# EAGLE board teensyShield1.8 (EAGLE 7.7.0)
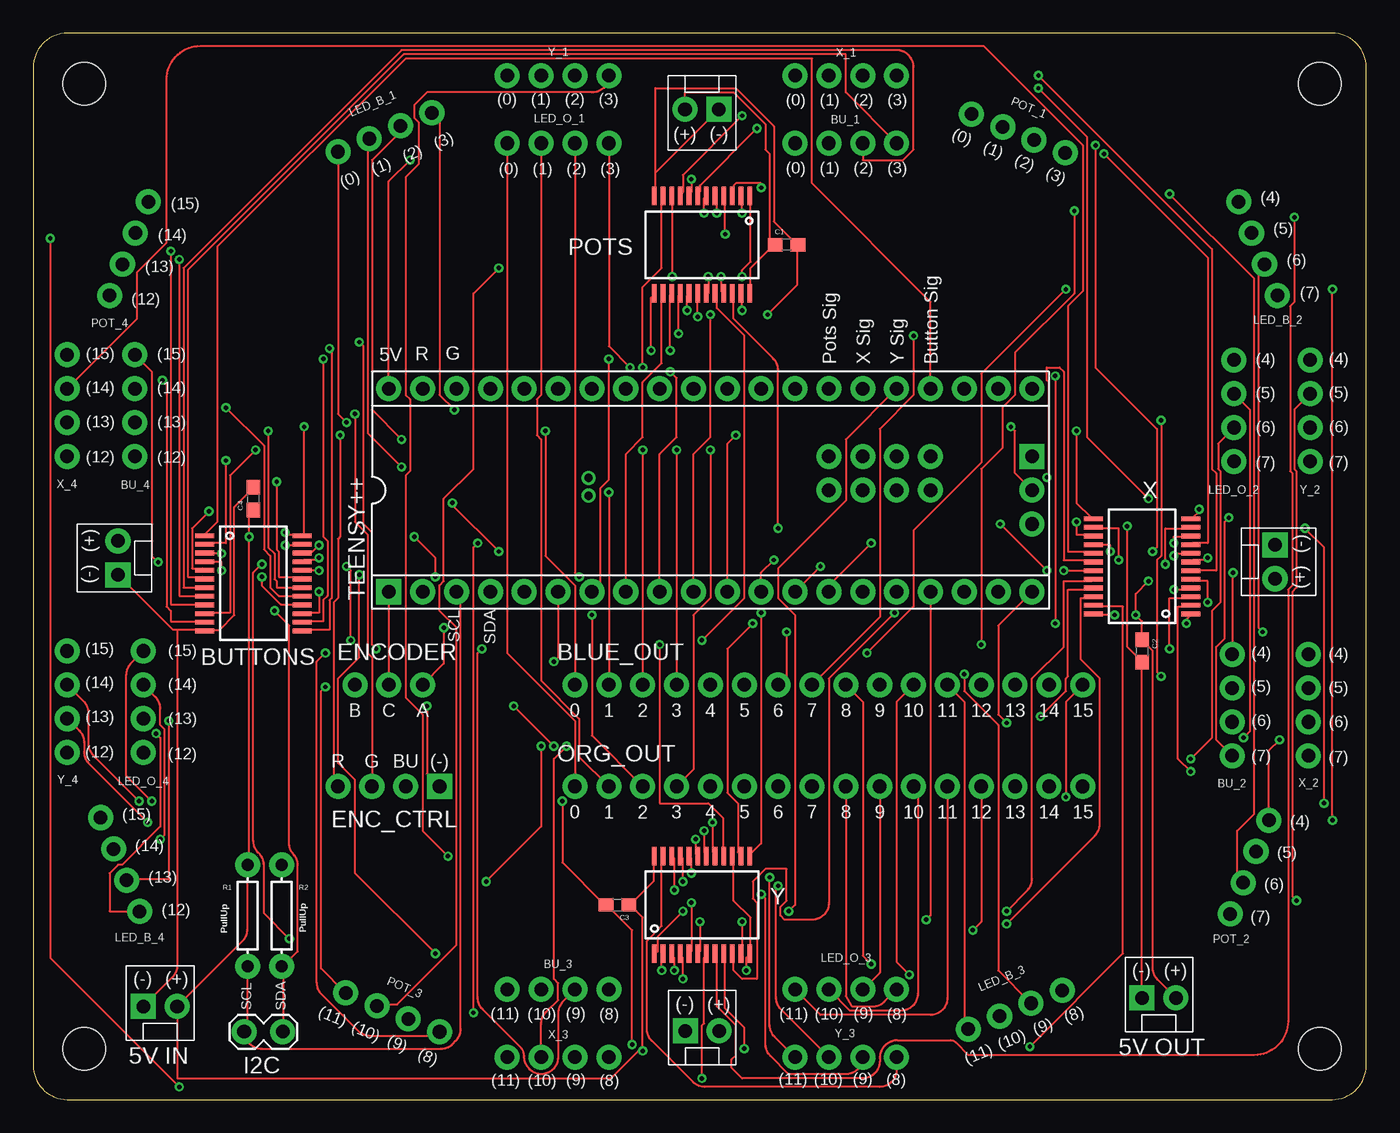
[diagram p0: board, top side]
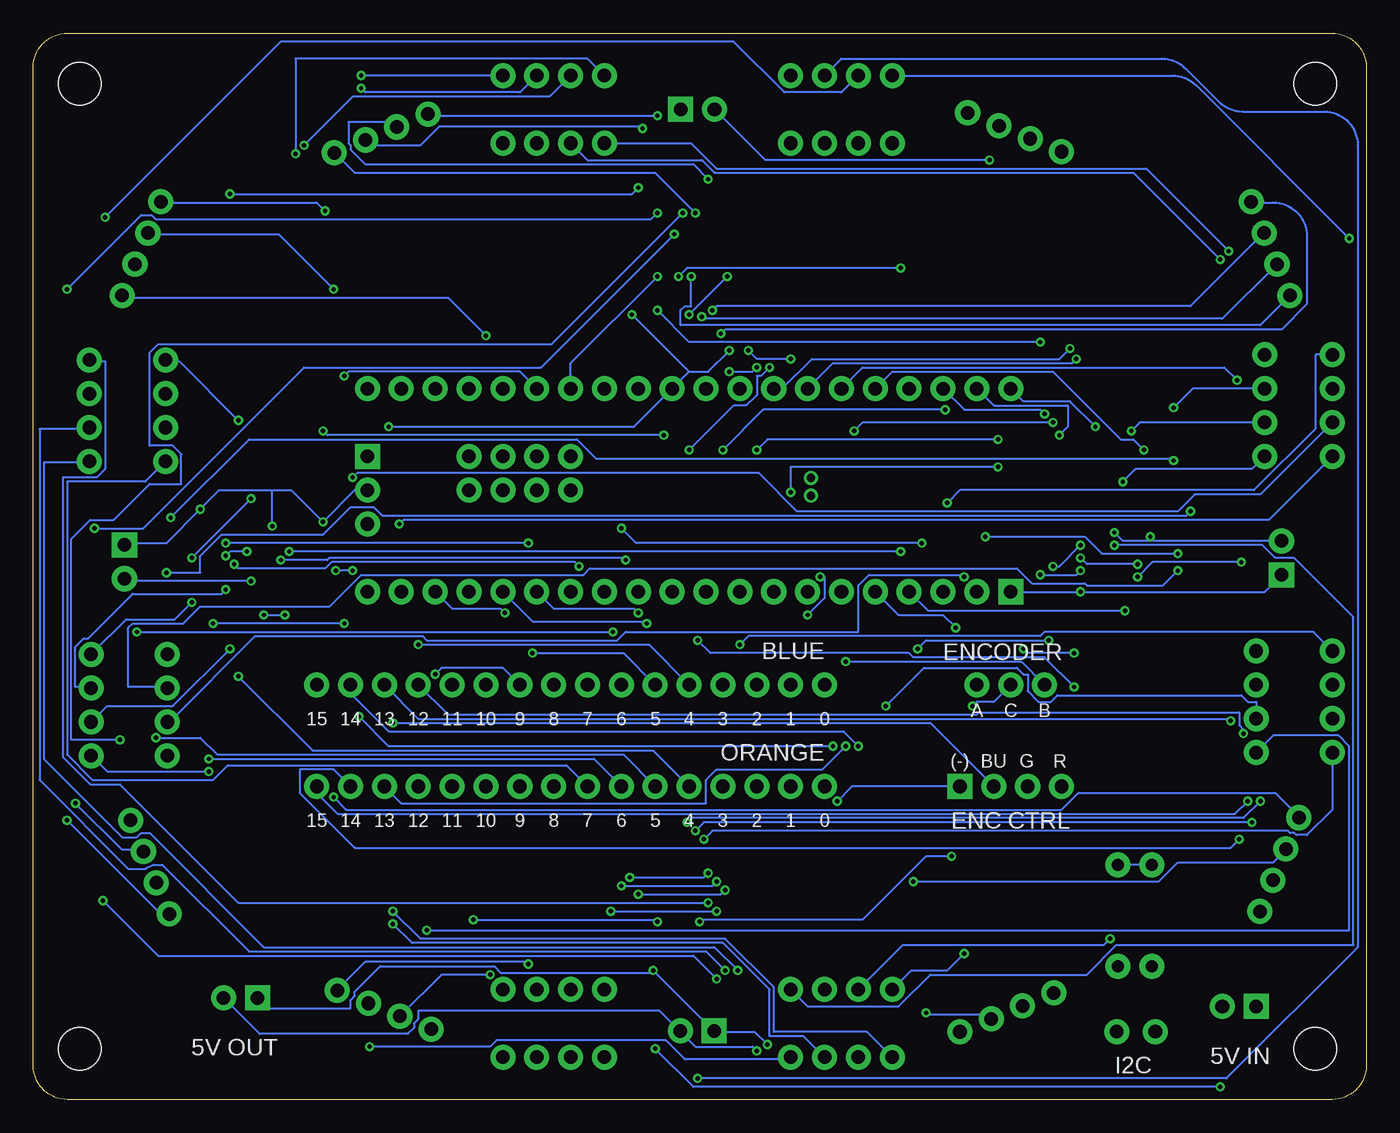
[diagram p1: board, bottom side, seen from below]

Size 100 x 80 mm. Coordinates in mm from the lower left corner, seen from the top.
Outline: 2.54,0 97.46,0 arc90 100,2.54 100,77.46 arc90 97.46,80 2.54,80 arc90 0,77.46 0,2.54 arc90 2.54,0
Copper layers (1*16): Top 0.0356mm / dielectric 1.5011mm / Bottom 0.0356mm
Design rules "oshpark-2layer": minimum track width 6mil, minimum drill 13mil, track to track 6mil, track to pad 6mil, pad to pad 6mil, via to via 6mil, smd to smd 6mil, copper to edge 15mil, drill to drill 6mil, minimum pad ring 7mil, minimum via ring 7mil, stop-mask expansion 2.5mil, vias tented up to drill 0mil, thermal gap 10mil
Holes 3.2 mm at 96.52,3.81 96.52,76.2 3.81,76.2 3.81,3.81

## Footprints (pad centres in the part's own frame; a part is rotated, then mirrored left to right if it is on the bottom)
1X16_NO_SILK = drill 1.016 pad 1.88: 1 0,0; 2 2.54,0; 3 5.08,0; 4 7.62,0; 5 10.16,0; 6 12.7,0; 7 15.24,0; 8 17.78,0; 9 20.32,0; 10 22.86,0; 11 25.4,0; 12 27.94,0; 13 30.48,0; 14 33.02,0; 15 35.56,0; 16 38.1,0
1X04_NO_SILK_ALL_ROUND = drill 1.016 pad 1.88: 1 0,0; 2 2.54,0; 3 5.08,0; 4 7.62,0
SSOP24 = smd 0.348 x 1.397: 1 -3.575,-3.656; 2 -2.925,-3.656; 3 -2.275,-3.656; 4 -1.625,-3.656; 5 -0.975,-3.656; 6 -0.325,-3.656; 7 0.325,-3.656; 8 0.975,-3.656; 9 1.625,-3.656; 10 2.275,-3.656; 11 2.925,-3.656; 12 3.575,-3.656; 13 3.575,3.656; 14 2.925,3.656; 15 2.275,3.656; 16 1.625,3.656; 17 0.975,3.656; 18 0.325,3.656; 19 -0.325,3.656; 20 -0.975,3.656; 21 -1.625,3.656; 22 -2.275,3.656; 23 -2.925,3.656; 24 -3.575,3.656
0603 = smd 1.1 x 1: 1 -0.85,0; 2 0.85,0
1X04_NO_SILK = drill 1.016 pad 1.88 square: 1 0,0 | drill 1.016 pad 1.88: 2 2.54,0; 3 5.08,0; 4 7.62,0
1X03_NO_SILK = drill 1.016 pad 1.88: 1 0,0; 2 2.54,0; 3 5.08,0
1X02_LOCK = drill 1.016 pad 1.88: 1 -0.178,0; 2 2.718,0
MOLEX-1X2 = drill 1.016 pad 1.88 square: 1 0,0 | drill 1.016 pad 1.88: 2 2.54,0
AXIAL-0.3 = drill 0.9 pad 1.88: P$1 -3.81,0; P$2 3.81,0
TEENSY++ = drill 1.016 pad 1.88: 5V 24.13,-2.54; +5V -24.13,7.62; A0 8.89,0; A1 11.43,0; A2 13.97,0; A3 16.51,0; A4 8.89,2.54; A5 11.43,2.54; A6 13.97,2.54; A7 16.51,2.54; B0 -6.35,7.62; B1 -8.89,7.62; B2 -11.43,7.62; B3 -13.97,7.62; B4 -16.51,7.62; B5 -19.05,7.62; B6 -21.59,7.62; B7 -21.59,-7.62; C0 6.35,-7.62; C1 8.89,-7.62; C2 11.43,-7.62; C3 13.97,-7.62; C4 16.51,-7.62; C5 19.05,-7.62; C6 21.59,-7.62; C7 24.13,-7.62; D0 -19.05,-7.62; D1 -16.51,-7.62; D2 -13.97,-7.62; D3 -11.43,-7.62; D4 -8.89,-7.62; D5 -6.35,-7.62; D6 -3.81,-7.62; D7 -1.27,-7.62; E0 1.27,-7.62; E1 3.81,-7.62; E6 -1.27,7.62; E7 -3.81,7.62; F0 6.35,7.62; F1 8.89,7.62; F2 11.43,7.62; F3 13.97,7.62; F4 16.51,7.62; F5 19.05,7.62; F6 21.59,7.62; F7 24.13,7.62; GND2 24.13,0; GRND1 1.27,7.62; REF 3.81,7.62 | drill 0.635 pad 1.067: E4 -9.144,0.914; E5 -9.144,-0.406 | drill 1.016 pad 1.88 square: GND -24.13,-7.62; RST 24.13,2.54

## Placement (x,y rotation side)
BLUE_OUT  [1X16_NO_SILK]  40.64,31.11 0 top
BU_1  [1X04_NO_SILK_ALL_ROUND]  57.15,71.75 0 top
BU_2  [1X04_NO_SILK_ALL_ROUND]  89.95,33.41 270 top
BU_3  [1X04_NO_SILK_ALL_ROUND]  43.18,8.26 180 top
BU_4  [1X04_NO_SILK_ALL_ROUND]  7.62,48.26 90 top
BUTTONS  MUX-74HC4067  [SSOP24]  16.51,38.73 270 top
C1  0.1uF  [0603]  56.52,64.14 0 top
C2  0.1uF  [0603]  83.19,33.66 270 top
C3  0.1uF  [0603]  43.81,14.61 180 top
C4  0.1uF  [0603]  16.51,45.09 90 top
ENC_CTRL  [1X04_NO_SILK]  30.48,23.5 180 top
ENCODER  [1X03_NO_SILK]  24.13,31.11 0 top
I2C  [1X02_LOCK]  18.54,5.09 180 top
LED_B_1  [1X04_NO_SILK_ALL_ROUND]  22.86,71.12 22.5 top
LED_B_2  [1X04_NO_SILK_ALL_ROUND]  90.43,67.36 292.5 top
LED_B_3  [1X04_NO_SILK_ALL_ROUND]  77.19,8.19 202.5 top
LED_B_4  [1X04_NO_SILK_ALL_ROUND]  7.97,14.11 112.5 top
LED_O_1  [1X04_NO_SILK_ALL_ROUND]  35.56,71.75 0 top
LED_O_2  [1X04_NO_SILK_ALL_ROUND]  90.08,55.5 270 top
LED_O_3  [1X04_NO_SILK_ALL_ROUND]  64.77,8.26 180 top
LED_O_4  [1X04_NO_SILK_ALL_ROUND]  8.26,26.04 90 top
ORG_OUT  [1X16_NO_SILK]  40.64,23.5 0 top
POT_1  [1X04_NO_SILK_ALL_ROUND]  70.38,73.95 337.5 top
POT_2  [1X04_NO_SILK_ALL_ROUND]  92.71,20.95 247.5 top
POT_3  [1X04_NO_SILK_ALL_ROUND]  30.48,5.08 157.5 top
POT_4  [1X04_NO_SILK_ALL_ROUND]  5.71,60.33 67.5 top
POTS  MUX-74HC4067  [SSOP24]  50.16,64.14 180 top
POW_1  [MOLEX-1X2]  6.35,39.37 90 top
POW_2  [MOLEX-1X2]  51.44,74.3 180 top
POW_3  [MOLEX-1X2]  93.16,41.62 270 top
POW_4  [MOLEX-1X2]  48.92,5.15 0 top
POW_IN  [MOLEX-1X2]  8.26,6.99 0 top
POW_OUT  [MOLEX-1X2]  83.19,7.62 0 top
R1  PullUp  [AXIAL-0.3]  16.09,13.8 90 top
R2  PullUp  [AXIAL-0.3]  18.63,13.8 270 top
TEENSY++  ARDUINO-TEENSY++  [TEENSY++]  50.8,45.72 0 top
X  MUX-74HC4067  [SSOP24]  83.19,40.01 90 top
X_1  [1X04_NO_SILK_ALL_ROUND]  57.15,76.83 0 top
X_2  [1X04_NO_SILK_ALL_ROUND]  95.66,33.41 270 top
X_3  [1X04_NO_SILK_ALL_ROUND]  43.18,3.17 180 top
X_4  [1X04_NO_SILK_ALL_ROUND]  2.54,48.26 90 top
Y  MUX-74HC4067  [SSOP24]  50.16,14.61 0 top
Y_1  [1X04_NO_SILK_ALL_ROUND]  35.56,76.83 0 top
Y_2  [1X04_NO_SILK_ALL_ROUND]  95.79,55.5 270 top
Y_3  [1X04_NO_SILK_ALL_ROUND]  64.77,3.17 180 top
Y_4  [1X04_NO_SILK_ALL_ROUND]  2.54,26.04 90 top

## Library data of the parts
BLUE_OUT ENCODER I2C ORG_OUT POW_1-POW_4 POW_IN POW_OUT = SparkFun-Connectors
BU_1-BU_4 ENC_CTRL LED_B_1-LED_B_4 LED_O_1-LED_O_4 POT_1-POT_4 X_1-X_4 Y_1-Y_4 = SparkFun-Connectors; PROD_ID: CONN-09696
BUTTONS C1-C4 POTS X Y = SparkFun
R1 R2 = SparkFun-Resistors; PROD_ID: RES-9435
TEENSY++ = teensypp

## Nets
5V: BUTTONS.24 C1.1 C2.1 C3.1 C4.1 POTS.24 POW_1.2 POW_2.2 POW_3.2 POW_4.2 POW_IN.2 POW_OUT.2 R1.P$2 R2.P$1 TEENSY++.+5V X.24 Y.24
BU_C0: BU_1.1 BUTTONS.9
BU_C1: BU_1.2 BUTTONS.8
BU_C2: BU_1.3 BUTTONS.7
BU_C3: BU_1.4 BUTTONS.6
BU_C4: BU_2.1 BUTTONS.5
BU_C5: BU_2.2 BUTTONS.4
BU_C6: BU_2.3 BUTTONS.3
BU_C7: BU_2.4 BUTTONS.2
BU_C8: BU_3.1 BUTTONS.23
BU_C9: BU_3.2 BUTTONS.22
BU_C10: BU_3.3 BUTTONS.21
BU_C11: BU_3.4 BUTTONS.20
BU_C12: BU_4.1 BUTTONS.19
BU_C13: BU_4.2 BUTTONS.18
BU_C14: BU_4.3 BUTTONS.17
BU_C15: BU_4.4 BUTTONS.16
ENC_1: ENCODER.3 TEENSY++.D2
ENC_2: ENCODER.1 TEENSY++.D3
ENC_BU: ENC_CTRL.2 TEENSY++.C7
ENC_G: ENC_CTRL.3 TEENSY++.B5
ENC_R: ENC_CTRL.4 TEENSY++.B6
GND: BUTTONS.12 BUTTONS.15 C1.2 C2.2 C3.2 C4.2 ENC_CTRL.1 ENCODER.2 POTS.12 POTS.15 POW_1.1 POW_2.1 POW_3.1 POW_4.1 POW_IN.1 POW_OUT.1 TEENSY++.GND TEENSY++.GND2 TEENSY++.GRND1 X.12 X.15 Y.12 Y.15
LED_B_C0: BLUE_OUT.1 LED_B_1.1
LED_B_C1: BLUE_OUT.2 LED_B_1.2
LED_B_C2: BLUE_OUT.3 LED_B_1.3
LED_B_C3: BLUE_OUT.4 LED_B_1.4
LED_B_C4: BLUE_OUT.5 LED_B_2.1
LED_B_C5: BLUE_OUT.6 LED_B_2.2
LED_B_C6: BLUE_OUT.7 LED_B_2.3
LED_B_C7: BLUE_OUT.8 LED_B_2.4
LED_B_C8: BLUE_OUT.9 LED_B_3.1
LED_B_C9: BLUE_OUT.10 LED_B_3.2
LED_B_C10: BLUE_OUT.11 LED_B_3.3
LED_B_C11: BLUE_OUT.12 LED_B_3.4
LED_B_C12: BLUE_OUT.13 LED_B_4.1
LED_B_C13: BLUE_OUT.14 LED_B_4.2
LED_B_C14: BLUE_OUT.15 LED_B_4.3
LED_B_C15: BLUE_OUT.16 LED_B_4.4
LED_O_C0: LED_O_1.1 ORG_OUT.1
LED_O_C1: LED_O_1.2 ORG_OUT.2
LED_O_C2: LED_O_1.3 ORG_OUT.3
LED_O_C3: LED_O_1.4 ORG_OUT.4
LED_O_C4: LED_O_2.1 ORG_OUT.5
LED_O_C5: LED_O_2.2 ORG_OUT.6
LED_O_C6: LED_O_2.3 ORG_OUT.7
LED_O_C7: LED_O_2.4 ORG_OUT.8
LED_O_C8: LED_O_3.1 ORG_OUT.9
LED_O_C9: LED_O_3.2 ORG_OUT.10
LED_O_C10: LED_O_3.3 ORG_OUT.11
LED_O_C11: LED_O_3.4 ORG_OUT.12
LED_O_C12: LED_O_4.1 ORG_OUT.13
LED_O_C13: LED_O_4.2 ORG_OUT.14
LED_O_C14: LED_O_4.3 ORG_OUT.15
LED_O_C15: LED_O_4.4 ORG_OUT.16
MUX1_S0: POTS.10 TEENSY++.D7
MUX1_S1: POTS.11 TEENSY++.D6
MUX1_S2: POTS.14 TEENSY++.D5
MUX1_S3: POTS.13 TEENSY++.D4
MUX1_SIG: POTS.1 TEENSY++.F1
MUX2_S0: TEENSY++.C1 X.10
MUX2_S1: TEENSY++.C0 X.11
MUX2_S2: TEENSY++.E1 X.14
MUX2_S3: TEENSY++.E0 X.13
MUX2_SIG: TEENSY++.F2 X.1
MUX3_S0: TEENSY++.C5 Y.10
MUX3_S1: TEENSY++.C4 Y.11
MUX3_S2: TEENSY++.C3 Y.14
MUX3_S3: TEENSY++.C2 Y.13
MUX3_SIG: TEENSY++.F3 Y.1
MUX4_S0: BUTTONS.10 TEENSY++.B3
MUX4_S1: BUTTONS.11 TEENSY++.B2
MUX4_S2: BUTTONS.14 TEENSY++.B1
MUX4_S3: BUTTONS.13 TEENSY++.B0
MUX4_SIG: BUTTONS.1 TEENSY++.F4
POT_C0: POT_1.1 POTS.9
POT_C1: POT_1.2 POTS.8
POT_C2: POT_1.3 POTS.7
POT_C3: POT_1.4 POTS.6
POT_C4: POT_2.1 POTS.5
POT_C5: POT_2.2 POTS.4
POT_C6: POT_2.3 POTS.3
POT_C7: POT_2.4 POTS.2
POT_C8: POT_3.1 POTS.23
POT_C9: POT_3.2 POTS.22
POT_C10: POT_3.3 POTS.21
POT_C11: POT_3.4 POTS.20
POT_C12: POT_4.1 POTS.19
POT_C13: POT_4.2 POTS.18
POT_C14: POT_4.3 POTS.17
POT_C15: POT_4.4 POTS.16
SCL: I2C.2 R1.P$1 TEENSY++.D0
SDA: I2C.1 R2.P$2 TEENSY++.D1
VCC: TEENSY++.5V
X_C0: X.9 X_1.1
X_C1: X.8 X_1.2
X_C2: X.7 X_1.3
X_C3: X.6 X_1.4
X_C4: X.5 X_2.1
X_C5: X.4 X_2.2
X_C6: X.3 X_2.3
X_C7: X.2 X_2.4
X_C8: X.23 X_3.1
X_C9: X.22 X_3.2
X_C10: X.21 X_3.3
X_C11: X.20 X_3.4
X_C12: X.19 X_4.1
X_C13: X.18 X_4.2
X_C14: X.17 X_4.3
X_C15: X.16 X_4.4
Y_C0: Y.9 Y_1.1
Y_C1: Y.8 Y_1.2
Y_C2: Y.7 Y_1.3
Y_C3: Y.6 Y_1.4
Y_C4: Y.5 Y_2.1
Y_C5: Y.4 Y_2.2
Y_C6: Y.3 Y_2.3
Y_C7: Y.2 Y_2.4
Y_C8: Y.23 Y_3.1
Y_C9: Y.22 Y_3.2
Y_C10: Y.21 Y_3.3
Y_C11: Y.20 Y_3.4
Y_C12: Y.19 Y_4.1
Y_C13: Y.18 Y_4.2
Y_C14: Y.17 Y_4.3
Y_C15: Y.16 Y_4.4

## Tracks (layer width: path | path; a pad name or v marks a point on that pad's centre or on a via)
5V  (via drill 0.33)
  Top 0.152: 55.56,64.14 53.82,62.39 53.82,60.48 POTS.24 | 55.56,64.14 55.24,64.45 55.24,70.96 54.93,71.28 54.93,73.18 52.55,75.56 48.9,75.56 POW_2.2 | 55.56,64.14 C1.1 | v18.89,42.55 18.89,42.39 20.16,42.39 BUTTONS.24 20.32,42.39 v20.32,50.48 | v28.26,70.48 26.67,68.9 TEENSY++.+5V | POW_OUT.2 84.35,8.99 arc-45 83.98,9.89 83.98,33.66 83.19,34.45 C2.1 83.19,35.88 v82.71,36.35 82.71,37.94 v83.66,38.89 | v81.12,36.35 79.53,36.35 X.24 | 44.77,14.61 46.51,16.35 46.51,18.26 Y.24 | 44.77,14.61 45.72,13.65 v45.72,3.65 45.4,3.65 43.34,1.59 10.79,1.59 POW_IN.2 15.66,11.85 arc45 16.03,12.75 16.03,17.46 R1.P$2 16.19,17.62 v16.19,42.23 16.19,43.81 16.51,44.13 C4.1 | 44.77,14.61 C3.1
  Bottom 0.152: v18.89,42.55 18.26,41.91 16.19,41.91 | POW_1.2 16.19,41.91 | TEENSY++.+5V 25.72,52.39 22.23,52.39 v20.32,50.48 | POW_2.2 45.09,70.48 v28.26,70.48 | v82.71,36.35 v81.12,36.35 | v83.66,38.89 92.87,38.89 93.03,39.05 POW_3.2 | v45.72,3.65 46.04,3.97 50.32,3.97 51.44,5.08 POW_4.2 51.59,5.24 53.02,6.67 71.12,6.67 71.12,6.03 71.44,5.71 71.44,5.4 71.91,4.92 83.03,4.92 POW_OUT.2 | R2.P$1 18.57,17.62 16.19,17.62 R1.P$2 | v16.19,42.23 16.19,41.91
BU_C0  (via drill 0.33)
  Top 0.152: v10.32,63.66 10.32,37.15 12.7,37.15 BUTTONS.9
  Bottom 0.152: v10.32,63.66 16.51,69.85 48.74,69.85 50.64,71.75 BU_1.1
BU_C1  (via drill 0.33)
  Top 0.152: v10.95,63.02 10.95,37.78 12.7,37.78 BUTTONS.8
  Bottom 0.152: v10.95,63.02 17.46,69.53 48.9,69.53 49.85,70.48 58.42,70.48 BU_1.2
BU_C2
  Top 0.152: BU_1.3 62.23,70.48 65.25,70.48 66.04,71.28 66.04,77.47 arc90 64.77,78.74 27.62,78.74 11.27,62.39 11.27,38.42 12.7,38.42 BUTTONS.7
BU_C3
  Top 0.152: BU_1.4 60.96,75.56 60.96,78.42 27.78,78.42 11.59,62.23 11.59,39.21 12.7,39.21 BUTTONS.6
BU_C4  (via drill 0.33)
  Top 0.152: v13.18,44.13 11.91,42.86 11.91,39.85 12.7,39.85 BUTTONS.5 | v90.01,39.53 90.01,33.5 BU_2.1
  Bottom 0.152: v13.18,44.13 13.49,43.81 73.82,43.81 74.45,44.45 76.2,44.45 78.26,42.39 85.88,42.39 87.47,40.8 87.47,39.53 v90.01,39.53
BU_C5  (via drill 0.33)
  Top 0.152: v14.13,39.69 14.13,40.32 12.86,40.32 BUTTONS.4
  Bottom 0.152: v14.13,39.69 15.24,38.58 20.95,38.58 21.11,38.73 25.08,38.73 26.19,39.85 58.26,39.85 58.74,39.37 75.41,39.37 77.79,36.99 87.47,36.99 88.74,35.72 92.55,35.72 92.87,35.4 92.87,30.96 90.01,30.96 BU_2.2
BU_C6  (via drill 0.33)
  Top 0.152: v14.13,40.96 12.86,40.96 BUTTONS.3 | v28.57,42.23 30.16,40.64 v30.16,39.21
  Bottom 0.152: v14.13,40.96 19.84,40.96 21.11,42.23 v28.57,42.23 | v30.16,39.21 30.32,39.37 37.31,39.37 38.1,38.58 38.1,35.08 55.56,35.08 56.2,34.45 70.48,34.45 70.8,34.77 83.34,34.77 89.69,28.42 89.85,28.42 BU_2.3
BU_C7  (via drill 0.33)
  Top 0.152: v14.45,47.94 14.45,41.75 12.86,41.75 BUTTONS.2 | v89.69,43.66 89.38,43.34 89.38,34.61 88.74,33.97 88.74,26.99 89.85,25.88 BU_2.4
  Bottom 0.152: v14.45,47.94 14.61,48.1 57.78,48.1 59.21,49.53 83.82,49.53 v89.69,43.66
BU_C8  (via drill 0.33)
  Top 0.152: v18.89,41.59 20.16,41.59 BUTTONS.23
  Bottom 0.152: v18.89,41.59 7.78,41.59 6.83,40.64 5.4,40.64 0.95,36.2 0.95,11.59 18.73,11.59 20.95,9.37 32.7,9.37 35.08,6.99 41.91,6.99 BU_3.1
BU_C9  (via drill 0.33)
  Top 0.152: v21.43,41.59 20.95,41.12 20.32,41.12 BUTTONS.22 | v23.5,40.01 23.81,39.69 v23.81,34.45 | v33.66,33.81 33.34,33.5 33.34,7.67 arc45 33.71,6.77 36.53,3.95 arc-45 36.83,3.23 arc45 37.2,2.33 37.29,2.24 arc45 38.1,1.91 arc90 39.37,3.17 39.37,6.46 arc-45 39.74,7.36 BU_3.2
  Bottom 0.152: v21.43,41.59 23.02,40.01 v23.5,40.01 | v23.81,34.45 33.02,34.45 v33.66,33.81
BU_C10  (via drill 0.33)
  Top 0.152: v21.43,40.64 21.43,40.48 20.32,40.48 BUTTONS.21 | v17.14,40.16 16.51,39.53 16.51,19.42 arc45 16.88,18.52 16.93,18.47 arc-45 17.3,17.57 17.3,13.97 v19.21,12.06
  Bottom 0.152: v21.43,40.64 20.95,40.16 v17.14,40.16 | v19.21,12.06 19.68,11.59 34.77,11.59 BU_3.3
BU_C11  (via drill 0.33)
  Top 0.152: v21.43,39.69 20.32,39.69 BUTTONS.20 | v24.45,39.37 24.45,33.18 22.86,31.59 22.86,25.24 24.13,23.97 24.13,16.99 v30.16,10.95
  Bottom 0.152: v21.43,39.69 21.75,39.37 v24.45,39.37 | v30.16,10.95 31.43,9.68 34.13,9.68 BU_3.4
BU_C12  (via drill 0.33)
  Top 0.152: v18.26,46.35 18.26,41.27 18.41,41.12 18.41,39.21 20.16,39.21 BUTTONS.19
  Bottom 0.152: v18.26,46.35 17.3,47.31 8.57,47.31 BU_4.1
BU_C13  (via drill 0.33)
  Top 0.152: v17.62,50.16 17.62,41.43 18.1,40.96 18.1,39.05 18.26,38.89 18.26,38.42 BUTTONS.18
  Bottom 0.152: v17.62,50.16 16.99,50.8 BU_4.2
BU_C14  (via drill 0.33)
  Top 0.152: v14.45,51.91 17.3,49.05 17.3,41.27 17.78,40.8 17.78,38.42 18.41,37.78 20.16,37.78 BUTTONS.17
  Bottom 0.152: v14.45,51.91 13.02,53.34 BU_4.3
BU_C15  (via drill 0.33)
  Top 0.152: v17.14,39.21 17.14,38.58 18.57,37.15 20.16,37.15 BUTTONS.16 | v9.37,40.32 8.89,40.8 8.89,54.61 BU_4.4
  Bottom 0.152: v17.14,39.21 16.03,40.32 v9.37,40.32
ENC_1  (via drill 0.33)
  Top 0.152: ENCODER.3 30.8,32.7 v30.8,35.4
  Bottom 0.152: v30.8,35.4 31.75,36.35 35.08,36.35 TEENSY++.D2
ENC_2  (via drill 0.33)
  Top 0.152: v39.05,32.86 39.37,33.18 TEENSY++.D3
  Bottom 0.152: ENCODER.1 25.88,32.86 v39.05,32.86
ENC_BU  (via drill 0.33)
  Top 0.152: v73.03,28.26 72.39,28.89 72.39,35.56 TEENSY++.C7
  Bottom 0.152: ENC_CTRL.2 32.7,28.26 v73.03,28.26
ENC_G  (via drill 0.33)
  Top 0.152: ENC_CTRL.3 25.4,33.18 25.08,33.5 25.08,42.39 24.13,43.34 v24.13,51.44
  Bottom 0.152: v24.13,51.44 24.45,51.75 30.16,51.75 TEENSY++.B5
ENC_R  (via drill 0.33)
  Top 0.152: ENC_CTRL.4 22.54,23.81 22.54,37.31 22.86,37.62 22.86,42.07 23.02,42.23 v23.02,49.85
  Bottom 0.152: v23.02,49.85 22.38,50.48 22.38,52.07 27.94,52.07 TEENSY++.B6
GND  (via drill 0.33)
  Top 0.152: C4.2 16.51,45.88 15.08,44.45 15.08,36.35 13.97,35.24 12.86,35.24 BUTTONS.12 12.7,35.24 10.79,35.24 | POW_1.1 10.48,35.24 10.79,35.24 | 10.79,35.24 10.79,10.05 arc-45 10.42,9.15 POW_IN.1 | Y.15 52.55,18.26 52.55,14.92 53.82,13.65 53.82,10.95 Y.12 53.66,10.79 53.5,10.64 v53.5,9.68 | v44.93,4.13 44.93,12.7 43.02,14.61 C3.2 42.86,14.61 39.69,17.78 v39.69,22.38 | v21.43,38.1 21.43,36.51 20.32,36.51 BUTTONS.15 | TEENSY++.GND ENCODER.2 | ENC_CTRL.1 29.53,24.45 v29.53,29.53 | v47.78,56.2 47.78,60.33 POTS.15 | 57.31,64.14 55.56,65.88 55.56,73.03 52.7,75.88 46.67,75.88 46.67,69.53 | 46.67,69.53 46.67,67.94 POTS.12 | 46.67,69.53 POW_2.1 | v55.09,58.9 57.31,61.12 57.31,64.14 | 57.31,64.14 C1.2 | v78.26,43.34 78.26,42.39 79.38,42.39 X.15 | v87.47,44.29 87.47,44.13 87,43.66 X.12 | POW_OUT.1 C2.2 83.19,32.86 82.07,33.97 v82.07,43.02 | v73.34,50.48 73.66,50.16 73.66,46.99 TEENSY++.GND2
  Bottom 0.152: v44.93,4.13 45.88,5.08 48.9,5.08 POW_4.1 49.05,5.24 v53.5,9.68 53.66,9.53 64.93,9.53 65.41,10 73.98,10 75.88,8.1 75.88,7.78 76.2,7.46 76.2,6.83 82.39,6.83 POW_OUT.1 | TEENSY++.GND v21.43,38.1 7.62,38.1 POW_1.1 | v29.53,29.53 29.21,29.84 27.94,29.84 ENCODER.2 | v39.69,22.38 38.58,23.5 ENC_CTRL.1 | v47.78,56.2 49.37,54.61 50.8,54.61 | 50.8,54.61 TEENSY++.GRND1 54.93,50.48 v73.34,50.48 | v55.09,58.9 50.8,54.61 | TEENSY++.GND2 75.88,45.72 v78.26,43.34 80.64,45.72 82.07,45.72 | POW_3.1 93.03,41.75 90.01,41.75 v87.47,44.29 86.04,45.72 82.07,45.72 | v82.07,43.02 82.07,45.72
LED_B_C0  (via drill 0.33)
  Top 0.152: BLUE_OUT.1 40.64,38.58 38.42,40.8 v38.42,50.16 | v23.5,50.8 22.86,51.44 LED_B_1.1
  Bottom 0.152: v38.42,50.16 37.78,50.8 v23.5,50.8
LED_B_C1  (via drill 0.33)
  Top 0.152: v43.18,45.56 BLUE_OUT.2 | v27.62,47.47 25.08,50.01 25.08,72.07 LED_B_1.2
  Bottom 0.152: v43.18,45.56 43.18,47.47 v27.62,47.47
LED_B_C2  (via drill 0.33)
  Top 0.152: v45.72,48.74 BLUE_OUT.3 | v27.62,49.53 25.4,51.75 25.4,70.48 27.46,72.55 27.46,73.03 LED_B_1.3
  Bottom 0.152: v45.72,48.74 44.93,49.53 v27.62,49.53
LED_B_C3  (via drill 0.33)
  Top 0.152: v48.26,48.74 BLUE_OUT.4 | v31.59,51.75 30.48,52.86 30.48,73.5 30,73.98 LED_B_1.4
  Bottom 0.152: v48.26,48.74 45.24,51.75 v31.59,51.75
LED_B_C4  (via drill 0.33)
  Top 0.152: v71.12,34.13 71.12,47.31 72.71,48.9 72.71,51.91 73.66,52.86 73.66,56.04 78.11,60.48 v78.11,66.67
  Bottom 0.152: BLUE_OUT.5 53.82,34.13 v71.12,34.13 | v78.11,66.67 78.74,67.31 90.33,67.31 LED_B_2.1
LED_B_C5  (via drill 0.33)
  Top 0.152: v62.55,33.5 66.04,36.99 66.04,42.7 71.12,47.78 71.12,54.45 v77.47,60.8
  Bottom 0.152: BLUE_OUT.6 55.72,33.5 v62.55,33.5 | v77.47,60.8 81.6,64.93 91.28,64.93 LED_B_2.2
LED_B_C6  (via drill 0.33)
  Top 0.152: BLUE_OUT.7 56.52,31.75 v56.52,35.08 | v92.23,35.08 91.92,35.4 91.92,62.23 92.23,62.55 LED_B_2.3
  Bottom 0.152: v92.23,35.08 v56.52,35.08
LED_B_C7  (via drill 0.33)
  Top 0.152: BLUE_OUT.8 63.5,36.2 63.5,50.32 66.04,52.86 v66.04,57.31
  Bottom 0.152: v66.04,57.31 68.9,60.17 93.19,60.17 LED_B_2.4
LED_B_C8  (via drill 0.33)
  Top 0.152: v62.87,10.16 62.23,10.79 62.23,29.84 BLUE_OUT.9
  Bottom 0.152: v62.87,10.16 63.02,10.32 75.09,10.32 77.15,8.26 LED_B_3.1
LED_B_C9  (via drill 0.33)
  Top 0.152: v69.85,31.91 69.85,30.64 72.39,28.1 72.39,9.68 74.77,7.3 LED_B_3.2
  Bottom 0.152: v69.85,31.91 69.37,32.38 64.77,32.38 BLUE_OUT.10
LED_B_C10  (via drill 0.33)
  Top 0.152: v65.72,9.37 64.77,10.32 64.77,29.84 BLUE_OUT.11
  Bottom 0.152: v65.72,9.37 69.37,9.37 72.39,6.35 LED_B_3.3
LED_B_C11
  Top 0.152: BLUE_OUT.12 69.85,29.84 69.85,5.56 70.01,5.4 LED_B_3.4
LED_B_C12  (via drill 0.33)
  Top 0.152: v9.21,27.46 9.53,27.15 9.53,20.48 6.67,17.62 6.35,17.62 5.71,16.99 5.71,14.13 7.94,14.13 LED_B_4.1
  Bottom 0.152: v9.21,27.46 9.21,27.78 9.53,28.1 9.53,29.05 29.05,29.05 29.21,28.89 68.9,28.89 BLUE_OUT.13
LED_B_C13  (via drill 0.33)
  Top 0.152: v10.16,28.42 10.16,16.51 7.14,16.51 LED_B_4.2
  Bottom 0.152: v10.16,28.42 10.32,28.57 71.12,28.57 BLUE_OUT.14
LED_B_C14  (via drill 0.33)
  Top 0.152: v33.97,16.35 38.1,20.48 v38.1,26.51
  Bottom 0.152: v33.97,16.35 15.56,16.35 14.13,17.78 6.99,17.78 6.03,18.73 LED_B_4.3 | v38.1,26.51 39.21,27.62 73.34,27.62 76.2,30.48 BLUE_OUT.15
LED_B_C15  (via drill 0.33)
  Top 0.152: v77.47,22.7 77.47,29.84 BLUE_OUT.16
  Bottom 0.152: v77.47,22.7 76.52,21.75 22.86,21.75 21.59,23.02 6.83,23.02 5.08,21.27 LED_B_4.4
LED_O_C0
  Top 0.152: ORG_OUT.1 40.64,28.42 35.56,33.5 LED_O_1.1
LED_O_C1
  Top 0.152: ORG_OUT.2 40.96,25.72 40.96,28.57 38.1,31.43 38.1,49.53 37.78,49.85 37.78,52.55 38.1,52.86 LED_O_1.2
LED_O_C2  (via drill 0.33)
  Top 0.152: ORG_OUT.3 41.91,27.3 v41.91,36.35 | v40.96,39.21 40.64,39.53 LED_O_1.3
  Bottom 0.152: v41.91,36.35 40.64,37.62 40.64,39.21 v40.96,39.21
LED_O_C3  (via drill 0.33)
  Top 0.152: ORG_OUT.4 49.53,24.77 49.53,36.35 50.8,37.62 v50.8,48.74 | v44.77,54.93 43.18,56.52 LED_O_1.4
  Bottom 0.152: v50.8,48.74 47.47,52.07 46.51,52.07 45.72,52.86 45.72,54.29 45.4,54.29 v44.77,54.93
LED_O_C4  (via drill 0.33)
  Top 0.152: v84.61,31.75 84.3,32.07 84.3,40.48 84.61,40.8 v84.61,50.96
  Bottom 0.152: ORG_OUT.5 53.5,26.19 79.06,26.19 v84.61,31.75 | v84.61,50.96 89.06,55.4 90.01,55.4 LED_O_2.1
LED_O_C5  (via drill 0.33)
  Top 0.152: v90.81,27.15 91.28,27.62 91.28,51.75 90.17,52.86 LED_O_2.2
  Bottom 0.152: ORG_OUT.6 55.72,25.88 86.2,25.88 87.47,27.15 v90.81,27.15
LED_O_C6  (via drill 0.33)
  Top 0.152: v86.84,25.56 88.42,27.15 88.42,36.67 89.06,37.31 89.06,47.15 88.9,47.31 88.9,49.21 90.01,50.32 LED_O_2.3
  Bottom 0.152: ORG_OUT.7 57.94,25.56 v86.84,25.56
LED_O_C7
  Bottom 0.152: ORG_OUT.8 60.01,25.08 85.41,25.08 86.52,23.97 95.57,23.97 97.47,25.88 97.47,46.35 91.6,46.35 90.17,47.78 LED_O_2.4
LED_O_C8
  Top 0.152: LED_O_3.1 63.87,7.36 arc-45 62.97,6.99 61.44,6.99 60.96,7.78 ORG_OUT.9
LED_O_C9
  Top 0.152: LED_O_3.2 63.5,9.53 ORG_OUT.10
LED_O_C10
  Top 0.152: LED_O_3.3 61.28,6.67 65.09,6.67 arc90 66.36,7.94 66.36,23.18 ORG_OUT.11
LED_O_C11
  Top 0.152: LED_O_3.4 59.05,6.35 67.31,6.35 arc90 68.58,7.62 ORG_OUT.12
LED_O_C12  (via drill 0.33)
  Top 0.152: v70.48,12.7 71.12,13.34 ORG_OUT.13
  Bottom 0.152: LED_O_4.1 6.99,27.3 2.06,27.3 1.27,26.51 1.27,12.7 v70.48,12.7
LED_O_C13  (via drill 0.33)
  Top 0.152: v39.05,26.51 v36.04,29.53
  Bottom 0.152: LED_O_4.2 8.26,29.84 8.89,29.84 9.37,30.32 23.18,30.32 23.65,29.84 24.61,29.84 25.4,30.64 25.4,31.91 25.72,31.91 26.19,32.38 33.18,32.38 v36.04,29.53 | v39.05,26.51 40.8,24.77 48.74,24.77 49.53,23.97 49.53,22.23 72.39,22.23 ORG_OUT.14
LED_O_C14  (via drill 0.33)
  Top 0.152: LED_O_4.3 9.15,30.22 arc-45 9.53,29.32 9.53,28.1 9.84,27.78 9.84,19.84 v9.53,19.53
  Bottom 0.152: v9.53,19.53 10.16,18.89 75.88,18.89 80.01,23.02 80.01,24.77 77.47,24.77 ORG_OUT.15
LED_O_C15  (via drill 0.33)
  Top 0.152: LED_O_4.4 7.36,32.76 arc45 6.99,31.86 6.99,24.29 v8.89,22.38
  Bottom 0.152: v8.89,22.38 9.84,21.43 77.15,21.43 78.74,23.02 ORG_OUT.16
MUX1_S0  (via drill 0.33)
  Top 0.152: v47.94,61.75 47.94,67.79 POTS.10 | v50.8,58.9 50.8,49.69 49.53,48.42 TEENSY++.D7
  Bottom 0.152: v50.8,58.9 v47.94,61.75
MUX1_S1  (via drill 0.33)
  Top 0.152: v45.72,54.93 45.72,60.96 47.15,62.39 47.15,67.79 POTS.11 | v47.78,54.61 48.26,54.13 48.26,49.69 46.99,48.42 TEENSY++.D6
  Bottom 0.152: v45.72,54.93 46.04,54.61 v47.78,54.61
MUX1_S2
  Top 0.152: TEENSY++.D5 44.45,48.42 45.72,49.69 45.72,53.82 47.15,55.24 47.15,60.33 POTS.14
MUX1_S3  (via drill 0.33)
  Top 0.152: v46.35,56.2 46.35,60.17 46.51,60.33 POTS.13 | v43.18,55.56 43.18,46.51 42.55,45.88 42.55,38.73 TEENSY++.D4
  Bottom 0.152: v46.35,56.2 45.72,55.56 v43.18,55.56
MUX1_SIG  (via drill 0.33)
  Top 0.152: v53.18,61.75 53.18,62.23 53.82,62.87 53.82,67.79 POTS.1
  Bottom 0.152: v53.18,61.75 59.69,55.24 TEENSY++.F1
MUX2_S0  (via drill 0.33)
  Top 0.152: v85.57,41.75 85.57,42.23 86.84,42.23 X.10 | v62.87,41.75 59.69,38.58 TEENSY++.C1
  Bottom 0.152: v62.87,41.75 v85.57,41.75
MUX2_S1  (via drill 0.33)
  Top 0.152: v84.93,40.16 84.93,42.86 86.84,42.86 X.11 | TEENSY++.C0 v59.05,40.01
  Bottom 0.152: v84.93,40.16 84.61,39.85 78.11,39.85 77.63,40.32 59.37,40.32 v59.05,40.01
MUX2_S2  (via drill 0.33)
  Top 0.152: v81.44,40.48 81.44,42.86 79.53,42.86 X.14 | v55.56,40.48 54.61,39.53 TEENSY++.E1
  Bottom 0.152: v81.44,40.48 77.95,40.48 77.79,40.64 55.72,40.64 v55.56,40.48
MUX2_S3  (via drill 0.33)
  Top 0.152: v78.26,50.16 78.26,44.77 79.38,43.66 X.13 | v52.7,49.85 52.07,49.21 TEENSY++.E0
  Bottom 0.152: v78.26,50.16 77.95,49.85 v52.7,49.85
MUX2_SIG  (via drill 0.33)
  Top 0.152: v86.52,35.72 86.52,36.04 86.84,36.35 X.1 | v76.68,54.29 v76.68,35.72
  Bottom 0.152: v76.68,35.72 v86.52,35.72 | v76.68,54.29 76.36,54.61 63.5,54.61 TEENSY++.F2
MUX3_S0  (via drill 0.33)
  Top 0.152: v64.61,36.51 59.69,31.59 59.69,14.76 arc-90 58.42,13.49 56.36,13.49 56.04,13.81 56.04,14.45 56.52,14.92 56.52,17.3 54.93,17.3 53.98,16.35 53.98,15.08 54.29,14.76 54.29,9.05 53.18,9.05 52.55,9.68 52.55,10.79 Y.10
  Bottom 0.152: v64.61,36.51 64.93,36.83 68.58,36.83 TEENSY++.C5
MUX3_S1  (via drill 0.33)
  Top 0.152: v53.18,13.34 53.18,10.95 Y.11 | v66.99,13.49 67.31,13.81 TEENSY++.C4
  Bottom 0.152: v53.18,13.34 53.34,13.49 v66.99,13.49
MUX3_S2  (via drill 0.33)
  Top 0.152: v53.98,35.72 52.07,33.81 52.07,23.02 52.86,22.23 52.86,18.57 53.02,18.41 Y.14
  Bottom 0.152: v53.98,35.72 54.13,35.88 62.55,35.88 TEENSY++.C3
MUX3_S3  (via drill 0.33)
  Top 0.152: v54.61,36.51 54.61,19.21 53.82,18.41 Y.13
  Bottom 0.152: v54.61,36.51 54.93,36.83 60.96,36.83 TEENSY++.C2
MUX3_SIG  (via drill 0.33)
  Top 0.152: v48.74,14.13 46.83,12.22 46.83,11.11 46.67,10.95 Y.1 | v56.67,14.13 57.15,14.61 57.15,36.35 55.88,37.62 55.88,39.85 60.96,44.93 60.96,49.53 TEENSY++.F3
  Bottom 0.152: v56.67,14.13 v48.74,14.13
MUX4_S0  (via drill 0.33)
  Top 0.152: v16.67,48.74 14.76,46.83 14.76,36.51 12.86,36.51 BUTTONS.10
  Bottom 0.152: v16.67,48.74 17.46,49.53 18.41,49.53 23.5,54.61 35.56,54.61 TEENSY++.B3
MUX4_S1  (via drill 0.33)
  Top 0.152: v9.68,53.98 10,53.66 10,36.99 10.32,36.67 10.32,35.88 12.7,35.88 BUTTONS.11
  Bottom 0.152: v9.68,53.98 10.64,54.93 37.78,54.93 TEENSY++.B2
MUX4_S2  (via drill 0.33)
  Top 0.152: v21.75,55.56 21.75,42.23 22.07,41.91 22.07,37.78 21.75,37.47 21.75,35.88 20.32,35.88 BUTTONS.14
  Bottom 0.152: v21.75,55.56 22.07,55.24 40.01,55.24 TEENSY++.B1
MUX4_S3  (via drill 0.33)
  Top 0.152: v22.23,56.36 22.38,56.2 22.38,37.62 22.23,37.47 22.23,35.24 20.32,35.24 BUTTONS.13
  Bottom 0.152: v22.23,56.36 23.02,55.56 41.59,55.56 43.81,53.34 TEENSY++.B0
MUX4_SIG
  Top 0.152: TEENSY++.F4 67.31,59.85 58.42,68.74 58.42,78.11 27.94,78.11 13.81,63.98 13.81,43.34 12.86,42.39 BUTTONS.1
POT_C0  (via drill 0.33)
  Top 0.152: v53.18,73.82 48.74,69.37 48.74,68.1 48.58,67.94 POTS.9
  Bottom 0.152: v53.18,73.82 70.33,73.82 POT_1.1
POT_C1  (via drill 0.33)
  Top 0.152: v49.37,69.06 49.37,68.1 49.21,67.94 POTS.8
  Bottom 0.152: v49.37,69.06 50.48,70.17 75.09,70.17 76.2,71.28 76.2,71.6 76.36,71.75 76.36,73.34 73.18,73.34 72.87,73.03 POT_1.2
POT_C2  (via drill 0.33)
  Top 0.152: v54.29,72.87 50.01,68.58 50.01,68.1 49.85,67.94 POTS.7
  Bottom 0.152: v54.29,72.87 54.45,73.03 69.53,73.03 70.96,71.6 74.61,71.6 74.93,71.91 POT_1.3
POT_C3  (via drill 0.33)
  Top 0.152: v50.32,66.52 50.32,67.63 POTS.6
  Bottom 0.152: v50.32,66.52 53.34,69.53 75.88,69.53 77.31,70.96 POT_1.4
POT_C4  (via drill 0.33)
  Top 0.152: v51.28,66.52 51.28,67.79 POTS.5 | v93.5,26.99 92.71,26.19 POT_2.1
  Bottom 0.152: v51.28,66.52 61.12,56.67 90.65,56.67 91.28,56.04 91.28,49.05 89.53,49.05 88.9,48.42 88.9,46.2 91.28,46.2 93.98,43.5 95.73,43.5 97.16,42.07 97.16,26.99 v93.5,26.99
POT_C5  (via drill 0.33)
  Top 0.152: v51.91,64.93 51.91,67.79 POTS.4 | v95.41,42.86 96.84,41.43 v96.84,22.23
  Bottom 0.152: v51.91,64.93 61.91,54.93 79.69,54.93 91.76,42.86 v95.41,42.86 | v96.84,22.23 93.34,18.73 91.76,18.73 POT_2.2
POT_C6  (via drill 0.33)
  Top 0.152: v54.61,68.42 54.61,68.74 52.7,68.74 52.55,68.58 52.55,67.94 POTS.3 | v85.25,67.94 91.6,61.59 91.6,21.43 90.33,20.16 90.33,16.67 90.65,16.35 POT_2.3
  Bottom 0.152: v54.61,68.42 55.09,67.94 v85.25,67.94
POT_C7  (via drill 0.33)
  Top 0.152: v53.18,66.52 53.18,67.79 POTS.2 | v97.47,20.95 v97.47,60.8
  Bottom 0.152: v53.18,66.52 53.66,66.04 90.81,66.04 91.12,66.36 91.92,66.36 v97.47,60.8 | v97.47,20.95 90.49,13.97 89.85,13.97 POT_2.4
POT_C8  (via drill 0.33)
  Top 0.152: v53.18,59.21 53.18,60.33 POTS.23 | v24.45,56.83 24.77,56.52 24.77,43.18 25.4,42.55 25.4,34.13 v25.72,33.81 | v21.91,33.5 21.27,32.86 21.27,8.78 arc45 21.64,7.88 24.39,5.13 arc45 25.29,4.76 30.48,4.76 POT_3.1
  Bottom 0.152: v53.18,59.21 50.8,56.83 v24.45,56.83 | v25.72,33.81 25.4,33.5 v21.91,33.5
POT_C9  (via drill 0.33)
  Top 0.152: v55.88,42.86 55.88,54.72 arc45 55.51,55.62 52.55,58.58 52.55,60.33 POTS.22 | v33.34,41.75 33.02,41.43 v33.02,6.51
  Bottom 0.152: v55.88,42.86 54.77,41.75 v33.34,41.75 | v33.02,6.51 32.86,6.35 28.42,6.35 28.26,6.19 POT_3.2
POT_C10  (via drill 0.33)
  Top 0.152: v51.59,61.75 51.59,60.64 51.75,60.48 POTS.21 | v34.92,62.39 33.02,60.48 33.02,47.31 30.8,45.09 30.8,38.89 30.48,38.58 30.48,36.67 31.75,35.4 31.75,11.59 27.3,7.14 25.88,7.14 POT_3.3
  Bottom 0.152: v51.59,61.75 50.96,62.39 v34.92,62.39
POT_C11  (via drill 0.33)
  Top 0.152: v50.16,34.45 53.34,37.62 53.34,57.31 51.28,59.37 51.28,60.33 POTS.20 | v21.91,30.96 21.59,30.64 21.59,9.84 23.34,8.1 POT_3.4
  Bottom 0.152: v50.16,34.45 49.21,33.5 34.29,33.5 33.97,33.18 24.13,33.18 v21.91,30.96
POT_C12  (via drill 0.33)
  Top 0.152: v50.64,61.75 50.64,60.48 POTS.19
  Bottom 0.152: v50.64,61.75 50.64,59.53 51.12,59.53 51.44,59.21 51.44,58.1 7.94,58.1 POT_4.1
POT_C13  (via drill 0.33)
  Top 0.152: v49.85,58.74 49.85,60.33 POTS.18
  Bottom 0.152: v49.85,58.74 49.69,58.58 10.79,58.58 6.83,62.55 POT_4.2
POT_C14  (via drill 0.33)
  Top 0.152: v49.05,59.21 49.05,60.33 POTS.17
  Bottom 0.152: v49.05,59.21 48.74,59.53 13.18,59.53 7.78,64.93 POT_4.3
POT_C15  (via drill 0.33)
  Top 0.152: v48.42,57.47 48.42,60.33 POTS.16
  Bottom 0.152: v48.42,57.47 48.1,57.78 6.35,57.78 4.45,59.69 4.45,64.77 arc-90 6.99,67.31 8.57,67.31 POT_4.4
SCL
  Top 0.152: R1.P$1 16.03,9.84 16.03,5.4 15.88,5.24 I2C.2 15.88,5.08 arc90 17.14,3.81 30.59,3.81 arc45 31.49,4.18 31.7,4.39 arc45 32.07,5.29 32.07,37.78 TEENSY++.D0
SDA  (via drill 0.33)
  Top 0.152: I2C.1 18.73,5.24 18.73,9.84 R2.P$2 18.73,10 19.84,11.11 19.84,17.57 arc45 19.47,18.47 arc-45 19.21,19.1 19.21,35.56 v18.1,36.67
  Bottom 0.152: TEENSY++.D1 32.86,36.67 v18.1,36.67
X_C0  (via drill 0.33)
  Top 0.152: v80.33,70.96 88.11,63.18 88.11,41.75 87,41.75 X.9
  Bottom 0.152: v80.33,70.96 80.33,78.11 58.42,78.11 X_1.1
X_C1  (via drill 0.33)
  Top 0.152: v85.57,40.8 85.57,40.96 86.84,40.96 X.8 | v83.98,41.12 84.3,41.43 84.3,50.32 79.69,54.93 v79.69,71.6
  Bottom 0.152: v85.57,40.8 85.25,41.12 v83.98,41.12 | v79.69,71.6 76.04,75.25 61.28,75.25 X_1.2
X_C2  (via drill 0.33)
  Top 0.152: v88.11,40.64 88.11,40.48 87,40.48 X.7 | v83.66,45.09 79.06,49.69 79.06,72.23 v75.41,75.88
  Bottom 0.152: v83.66,45.09 v88.11,40.64 | v75.41,75.88 75.09,75.56 63.5,75.56 X_1.3
X_C3  (via drill 0.33)
  Top 0.152: v75.41,76.83 88.42,63.82 88.42,47.31 88.74,46.99 88.74,39.69 87,39.69 X.6
  Bottom 0.152: X_1.4 v75.41,76.83
X_C4  (via drill 0.33)
  Top 0.152: v88.11,37.31 88.11,38.89 87,38.89 X.5
  Bottom 0.152: v88.11,37.31 89.38,36.04 93.03,36.04 95.57,33.5 X_2.1
X_C5  (via drill 0.33)
  Top 0.152: v85.57,38.26 86.84,38.26 X.4
  Bottom 0.152: v85.57,38.26 85.88,37.94 92.55,37.94 95.89,34.61 96.2,34.61 96.84,33.97 96.84,30.96 95.73,30.96 X_2.2
X_C6  (via drill 0.33)
  Top 0.152: v85.25,33.81 85.25,37.62 86.84,37.62 X.3
  Bottom 0.152: v85.25,33.81 89.53,29.53 94.46,29.53 95.57,28.42 X_2.3
X_C7  (via drill 0.33)
  Top 0.152: v86.84,24.61 85.88,25.56 85.88,36.99 86.84,36.99 X.2
  Bottom 0.152: v86.84,24.61 94.46,24.61 95.57,25.72 X_2.4
X_C8  (via drill 0.33)
  Top 0.152: v74.77,3.97 81.76,10.95 81.76,36.99 79.53,36.99 X.23
  Bottom 0.152: v74.77,3.97 65.72,3.97 65.25,4.45 52.55,4.45 51.12,3.02 43.34,3.02 X_3.1
X_C9  (via drill 0.33)
  Top 0.152: v73.03,13.18 79.64,19.79 arc45 80.01,20.69 80.01,31.59 78.58,33.02 78.58,37.62 79.38,37.62 X.22
  Bottom 0.152: v73.03,13.18 71.6,11.75 48.26,11.75 44.77,8.26 44.77,4.76 42.23,4.76 X_3.2
X_C10  (via drill 0.33)
  Top 0.152: v75.56,28.73 77.47,30.64 77.47,31.59 77.63,31.75 77.63,38.26 79.38,38.26 X.21 | v40.01,26.51 39.05,25.56 39.05,9.05 39.37,8.73 39.37,7.46 38.47,6.56 arc45 38.1,5.67 X_3.3
  Bottom 0.152: v75.56,28.73 73.34,26.51 v40.01,26.51
X_C11  (via drill 0.33)
  Top 0.152: v73.03,14.13 74.56,15.66 arc45 74.93,16.56 74.93,31.59 77.31,33.97 77.31,38.89 79.38,38.89 X.20
  Bottom 0.152: v73.03,14.13 70.96,12.06 48.1,12.06 44.45,8.41 44.45,5.08 37.47,5.08 X_3.4
X_C12  (via drill 0.33)
  Top 0.152: v77.31,39.69 79.38,39.69 X.19 | v72.55,43.18 v76.04,39.69
  Bottom 0.152: v76.04,39.69 v77.31,39.69 | v72.55,43.18 72.23,43.5 7.3,43.5 X_4.1
X_C13  (via drill 0.33)
  Top 0.152: v76.04,46.67 76.2,46.83 76.2,53.82 76.04,53.98 76.04,54.93 76.99,54.93 77.31,54.61 77.31,40.48 79.38,40.48 X.18
  Bottom 0.152: v76.04,46.67 75.72,46.99 45.56,46.99 42.7,44.13 14.13,44.13 12.86,45.4 7.94,45.4 X_4.2
X_C14
  Top 0.152: X_4.3 7.78,58.58 7.78,62.07 10,64.29 10,76.52 arc-90 12.54,79.06 71.28,79.06 78.74,71.6 78.74,60.64 77.63,59.53 77.63,41.12 79.38,41.12 X.17
X_C15  (via drill 0.33)
  Top 0.152: v80.8,41.12 80.8,41.59 79.53,41.59 X.16 | v34.92,41.12 31.43,44.61 v31.43,44.77
  Bottom 0.152: v34.92,41.12 v80.8,41.12 | v31.43,44.77 30.48,45.72 8.41,45.72 3.81,50.32 3.81,55.88 X_4.4
Y_C0  (via drill 0.33)
  Top 0.152: v53.34,3.81 53.34,5.4 51.91,6.83 51.91,10.79 Y.9 | v10.95,0.95 1.27,10.64 v1.27,64.61
  Bottom 0.152: v53.34,3.81 50.48,0.95 v10.95,0.95 | Y_1.1 14.55,76.83 arc45 12.75,76.09 v1.27,64.61
Y_C1  (via drill 0.33)
  Top 0.152: v94.61,66.2 94.61,59.85 94.3,59.53 94.3,47.15 94.46,46.99 94.46,38.58 94.14,38.26 94.14,5.87 arc-90 91.6,3.33 70.17,3.33 69.22,4.29 arc45 68.83,4.45 64.82,4.45 arc45 63.92,4.07 63.87,4.02 arc45 63.5,3.12 63.5,2.86 arc-90 62.23,1.59 53.18,1.59 52.39,2.38 52.39,3.02 52.7,3.33 52.7,5.56 51.28,6.99 51.28,10.79 Y.8
  Bottom 0.152: v94.61,66.2 81.44,79.38 47.47,79.38 43.66,75.56 39.37,75.56 Y_1.2
Y_C2  (via drill 0.33)
  Top 0.152: v50.16,1.59 50.16,5.56 50.32,5.71 50.32,10.64 50.48,10.79 Y.7
  Bottom 0.152: v50.16,1.59 10.48,1.59 0.64,11.43 0.64,71.6 arc-90 3.17,74.14 9.27,74.14 arc45 11.06,74.88 13.54,77.36 arc-45 15.34,78.11 39.37,78.11 Y_1.3
Y_C3  (via drill 0.33)
  Top 0.152: v50.01,13.34 50.01,11.11 Y.6 | v31.11,18.26 29.21,20.16 29.21,28.89 27.94,30.16 27.94,46.83 28.26,47.15 28.26,52.55 27.94,52.86 27.94,69.22 28.89,70.17 28.89,73.34 28.57,73.66 28.57,74.61 29.53,75.56 41.91,75.56 arc90 Y_1.4
  Bottom 0.152: v50.01,13.34 49.85,13.49 37.78,13.49 33.02,18.26 v31.11,18.26
Y_C4  (via drill 0.33)
  Top 0.152: v49.37,14.76 49.37,11.11 49.21,10.95 Y.5
  Bottom 0.152: v49.37,14.76 84.61,14.76 93.5,23.65 95.73,23.65 97.79,25.72 97.79,46.67 95.25,46.67 94.61,47.31 94.61,55.4 95.73,55.4 Y_2.1
Y_C5  (via drill 0.33)
  Top 0.152: v48.74,9.05 48.74,10.64 48.58,10.79 Y.4 | v94.77,14.92 94.46,15.24 94.46,38.1 94.77,38.42 94.77,47.15 94.61,47.31 94.61,51.75 95.73,52.86 Y_2.2
  Bottom 0.152: v48.74,9.05 50.48,10.79 90.65,10.79 v94.77,14.92
Y_C6  (via drill 0.33)
  Top 0.152: v48.1,9.68 48.1,10.64 47.94,10.79 Y.3
  Bottom 0.152: v48.1,9.68 49.53,11.11 83.82,11.11 90.33,17.62 90.96,17.62 91.6,17.3 92.87,17.3 99.54,23.97 99.54,50.32 95.89,50.32 Y_2.3
Y_C7  (via drill 0.33)
  Top 0.152: v47.15,9.68 47.15,10.79 Y.2
  Bottom 0.152: v47.15,9.68 48.9,11.43 82.71,11.43 91.28,20 91.92,20 92.23,19.68 93.34,19.68 99.22,25.56 99.22,47.78 95.89,47.78 Y_2.4
Y_C8
  Top 0.152: Y_3.1 64.77,2.22 arc-90 63.5,0.95 50.37,0.95 arc-45 49.48,1.32 46.41,4.39 arc-45 46.04,5.29 46.04,11.91 47.15,13.02 47.15,18.26 Y.23
Y_C9  (via drill 0.33)
  Top 0.152: v48.1,15.72 48.1,18.1 47.94,18.26 Y.22 | v54.61,15.4 54.93,15.08 54.93,4.18 arc45 55.3,3.28 56.67,1.91 60.96,1.91 arc90 Y_3.2
  Bottom 0.152: v48.1,15.72 48.42,15.4 v54.61,15.4
Y_C10  (via drill 0.33)
  Top 0.152: v48.74,16.35 48.74,18.1 48.58,18.26 Y.21 | v55.88,16.03 55.72,15.88 55.72,7.67 arc45 56.09,6.77 Y_3.3
  Bottom 0.152: v48.74,16.35 49.05,16.03 v55.88,16.03
Y_C11  (via drill 0.33)
  Top 0.152: v49.37,16.99 49.37,18.1 49.21,18.26 Y.20 | Y_3.4 55.62,4.71 arc-45 55.24,5.61 v55.24,16.67
  Bottom 0.152: v49.37,16.99 49.69,16.67 v55.24,16.67
Y_C12  (via drill 0.33)
  Top 0.152: v49.69,19.53 49.69,18.41 Y.19
  Bottom 0.152: v49.69,19.53 49.05,20.16 5.87,20.16 5.71,20 5.4,20 5.24,19.84 4.45,19.84 2.54,21.75 Y_4.1
Y_C13  (via drill 0.33)
  Top 0.152: v50.32,20.16 50.32,18.57 50.48,18.41 Y.18 | v8.57,20.8 4.18,25.19 arc-45 3.81,26.09 3.81,26.78 arc45 3.44,27.68 Y_4.2
  Bottom 0.152: v50.32,20.16 49.69,20.8 v8.57,20.8
Y_C14  (via drill 0.33)
  Top 0.152: v50.96,20.8 50.96,18.57 51.12,18.41 Y.17 | v7.94,22.38 4.5,25.82 arc-45 4.13,26.72 4.13,29 arc45 3.76,29.9 Y_4.3
  Bottom 0.152: v50.96,20.8 50.64,21.11 9.21,21.11 v7.94,22.38
Y_C15  (via drill 0.33)
  Top 0.152: v46.99,34.13 46.99,22.23 50.64,22.23 51.75,21.11 51.75,18.41 Y.16
  Bottom 0.152: v46.99,34.13 46.35,34.77 24.45,34.77 24.13,35.08 3.97,35.08 Y_4.4

## Text on the board
bPlace: ENCODER | BLUE | B | C | A | 0 | 1 | 2 | 3 | 4 | 5 | 6 | 7 | 8 | 9 | 10 | 11 | 12 | 13 | 14 | 15 | ORANGE | R | G | BU | (-) | ENC CTRL | 0 | 1 | 2 | 3 | 4 | 5 | 6 | 7 | 8 | 9 | 10 | 11 | 12 | 13 | 14 | 15 | 5V OUT | 5V IN | I2C
tNames: (0) | (1) | (2) | (3) | (0) | (1) | (2) | (3) | (3) | (+) | (-) | (0) | (2) | (1) | (1) | (0) | (1) | (2) | (3) | (0) | (1) | (2) | (3) | (2) | (0) | (3) | (4) | (15) | (14) | (5) | (13) | (6) | (7) | (12) | (15) | (15) | (4) | (4) | 5V | R | G | Pots Sig | X Sig | Y Sig | Button Sig | (14) | (14) | (5) | (5) | (13) | (13) | (6) | (6) | (12) | (12) | (7) | (7) | (+) | (-) | (-) | (+) | (15) | (15) | SCL | SDA | (4) | (4) | (14) | (14) | (5) | (5) | (13) | (13) | B | C | A | 0 | 1 | 2 | 3 | 4 | 5 | 6 | 7 | 8 | 9 | 10 | 11 | 12 | 13 | 14 | 15 | (6) | (6) | (12) | (12) | (7) | (7) | R | G | BU | (-) | 0 | 1 | 2 | 3 | 4 | 5 | 6 | 7 | 8 | 9 | 10 | 11 | 12 | 13 | 14 | 15 | (15) | (4) | (14) | (5) | (13) | (6) | (12) | (7) | (-) | (+) | (-) | (+) | SCL | SDA | (-) | (+) | (11) | (11) | (10) | (9) | (8) | (11) | (10) | (9) | (8) | (8) | (10) | (9) | (9) | (10) | 5V IN | (8) | (11) | 5V OUT | (11) | (10) | (9) | (8) | (11) | (10) | (9) | (8)